# Altium PCB StepStick.PcbDoc
Units mil, origin at the board's own origin, x right, y up, seen from the top; angles counter-clockwise.
Board outline 1100 x 1250 mil, 2 copper layers (Top Layer, Bottom Layer); 4 components, 11 nets, 27 pads, 0 vias.
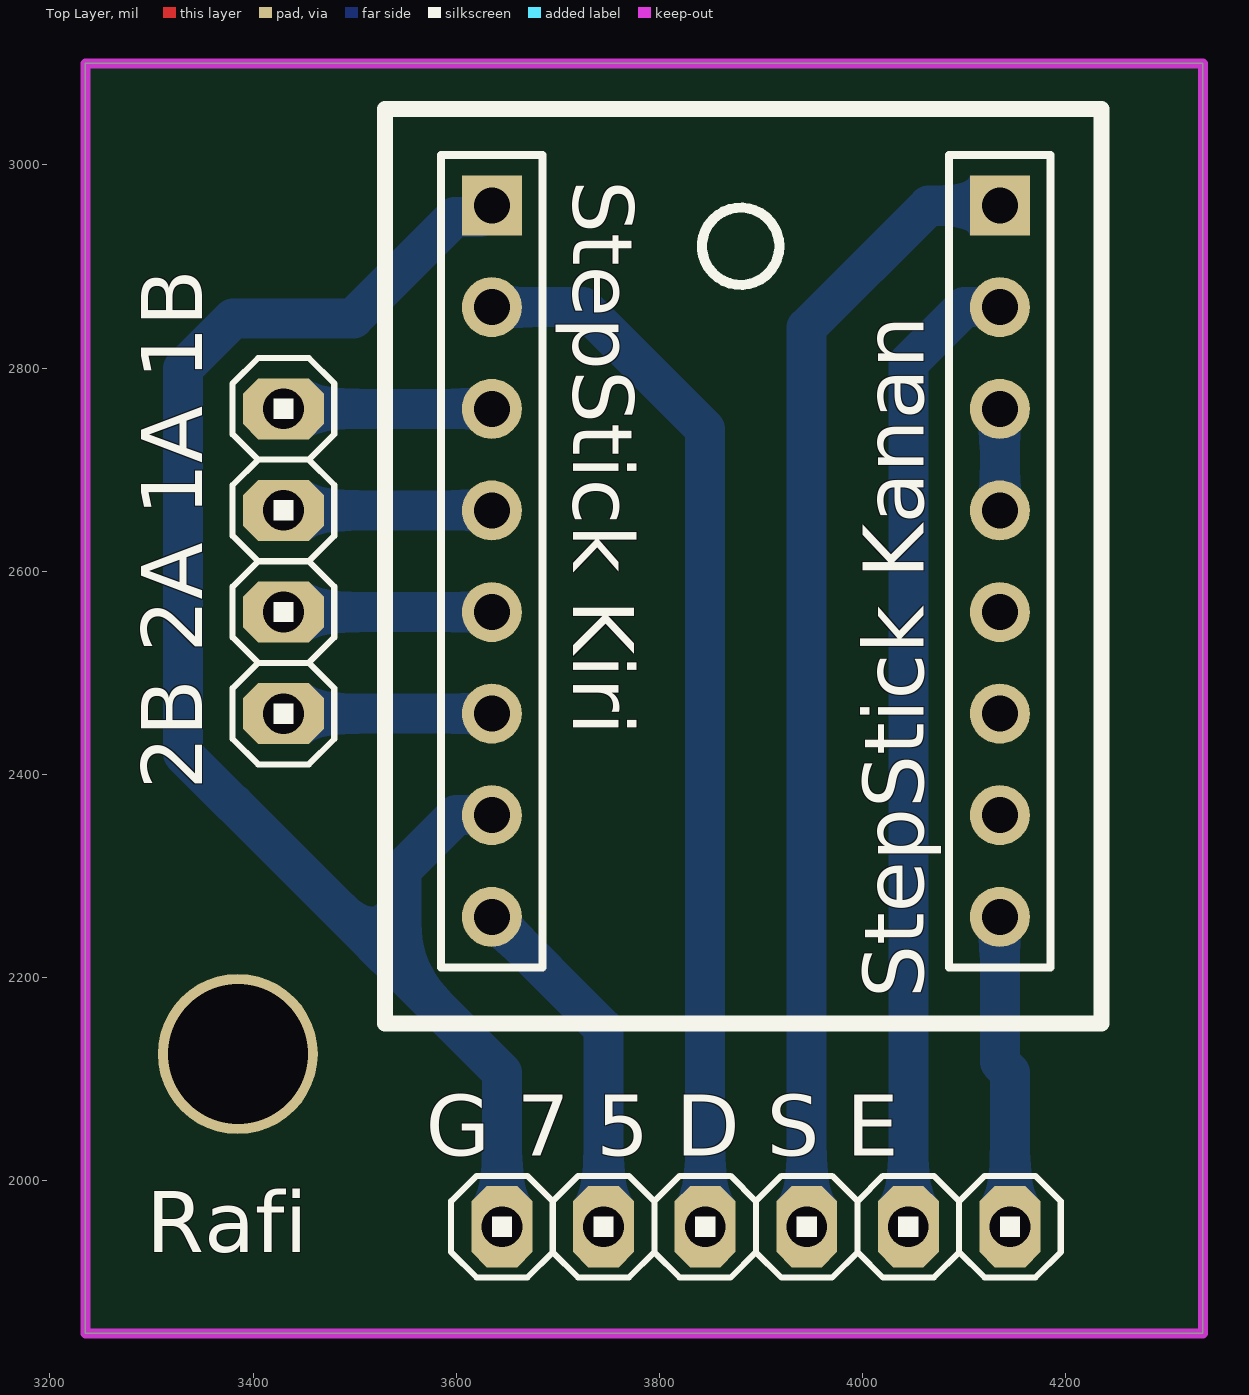
[diagram p0: Top Layer view]
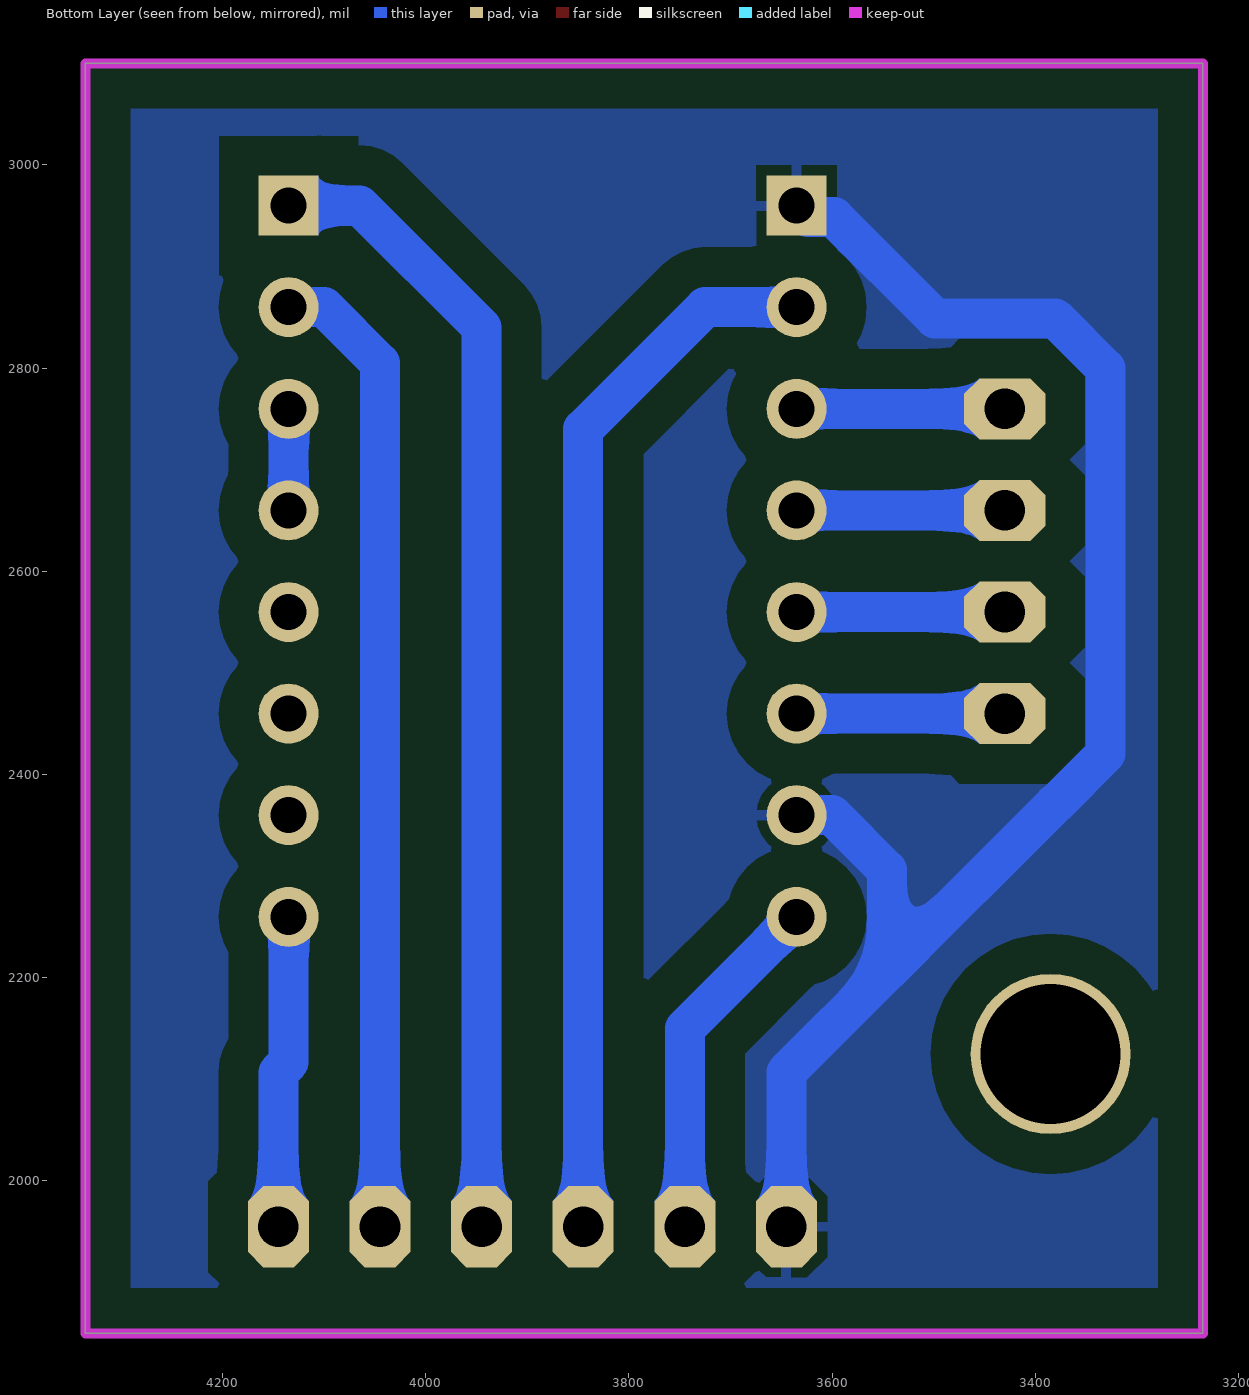
[diagram p1: Bottom Layer view, seen from below]

## Layer stack, top to bottom
Top Solder: solder mask 0.4, Solder Resist, Dk 3.5
Top Layer: signal copper 1.4
Dielectric 1: dielectric 12.6, FR-4, Dk 4.8
Bottom Layer: signal copper 1.4
Bottom Solder: solder mask 0.4, Solder Resist, Dk 3.5

## Board outline
3235,1850 3235,3100 4335,3100 4335,1850

## Design rules (kind name [scope] priority, off if disabled: settings)
Clearance [All] p1: gap=39.37
PolygonConnect [All] p1: connectstyle=Relief reliefconductorwidth=10 reliefentries=4 polygonreliefangle="90 Angle" airgapwidth=10
RoutingVias [All] p1: holewidth=28 width=50 viastyle="Through Hole" minholewidth=28 minwidth=50 maxholewidth=28 maxwidth=50
SolderMaskExpansion [All] p1: expansion=4
Width [All] p1: maxlimit=39.37 minlimit=39.37 preferedwidth=39.37
30 further rules are at their usual default settings.

## Components (designator, comment, footprint, x,y, rotation, side; value= is the part's Value field where it differs from the comment)
"2B 2A 1A 1B" "" My_1X04 3430,2610 r270 top (schematic designator Stepper)
"G 7 5 D S E" "Header 6" My_1X06 3895,1955 r0 top (schematic designator Out)
"StepStick Kanan" "" HDR1X8 4135,2960 r270 top
"StepStick Kiri" "" HDR1X8 3635,2960 r270 top

## Footprints (in the part's own frame and the unit in brackets; to place one, negate y for a bottom-side part, rotate by r counter-clockwise, add the part's x,y. Pads: shape width x height; smd on the part's side, far side on the other; paste and mask are expansions set on the pad)
HDR1X8 [mm] "Connector; Header; 8 Position"
  rect 1.5x1.5 hole 0.9: 1(0,0)
  round 1.5 hole 0.9: 2(2.54,0) 3(5.08,0) 4(7.62,0) 5(10.16,0) 6(12.7,0) 7(15.24,0) 8(17.78,0)
  silkscreen extent -1.27,-1.27 19.05,1.27
My_1X04 [mil]
  oct 60x80 hole 40: 1(-150,0) 2(-50,0) 3(50,0) 4(150,0)
  silkscreen extent -200,-50 200,50
My_1X06 [mil]
  oct 60x80 hole 40: 1(-250,0) 2(-150,0) 3(-50,0) 4(50,0) 5(150,0) 6(250,0)
  silkscreen extent -300,-50 300,50

## Part data
"2B 2A 1A 1B": library part "Header 4", "Header, 4-Pin"
"G 7 5 D S E": "Header, 6-Pin"
"StepStick Kanan" "StepStick Kiri": library part "Header 8", "Header, 8-Pin"

## Free pads (board coordinates)
  round 157.48 hole 137.8: 2(3385,2125)

## Nets (pads, with @x,y where several pads share a name; then routed paths per layer and width w, separated by ;. In a path a pad name is that pad's centre, name@x,y a point inside that pad or via, vN(x,y) a via of type N, cw(c..) or ccw(c..) an arc to the next point about the centre after c; other vN are vias at no path point)
+5: "G 7 5 D S E.3" "StepStick Kiri.2" | length 1044.7
  Bottom Layer w39.37: 3635,2860 3725,2860 3845,2740 3845,1955
+7.4: "G 7 5 D S E.2" "StepStick Kiri.8" | length 350.6
  Bottom Layer w39.37: 3635,2260 3745,2150 3745,1955
GND: "G 7 5 D S E.1" "StepStick Kiri.1" "StepStick Kiri.7" | length 1556.8
  Bottom Layer w39.37: 3635,2360 3600,2360 3546,2306 3546,2206 ; 3635,2960 3623.58,2948.58 3598.31,2948.58 3498.78,2849.06 3380.54,2849.06 3330.94,2799.46 3330.94,2420.54 3380.54,2370.94 3381.06,2370.94 3546,2206 ; 3645,1955 3645,2107 3546,2206
NetOut_4: "G 7 5 D S E.4" "StepStick Kanan.1" | length 1124.7
  Bottom Layer w39.37: 3945,1955 3945,2840 4065,2960 4135,2960
NetOut_5: "G 7 5 D S E.5" "StepStick Kanan.2" | length 962.8
  Bottom Layer w39.37: 4045,1955 4045,2805 4100,2860 4135,2860
NetOut_6: "G 7 5 D S E.6" "StepStick Kanan.8" | length 309.1
  Bottom Layer w39.37: 4135,2260 4135,2117 4145,2107 4145,1955
NetStepper_1: "2B 2A 1A 1B.1" "StepStick Kiri.3" | length 205
  Bottom Layer w39.37: 3430,2760 3635,2760
NetStepper_2: "2B 2A 1A 1B.2" "StepStick Kiri.4" | length 205
  Bottom Layer w39.37: 3430,2660 3635,2660
NetStepper_3: "2B 2A 1A 1B.3" "StepStick Kiri.5" | length 205
  Bottom Layer w39.37: 3430,2560 3635,2560
NetStepper_4: "2B 2A 1A 1B.4" "StepStick Kiri.6" | length 205
  Bottom Layer w39.37: 3430,2460 3635,2460
"NetStepStick Kanan_3": "StepStick Kanan.3" "StepStick Kanan.4" | length 100
  Bottom Layer w39.37: 4135,2660 4135,2760
pads on no net: "StepStick Kanan.5" "StepStick Kanan.6" "StepStick Kanan.7"

## Polygon pours and split planes (outlines as drawn)
GND on Bottom Layer "Bottom Layer-GND" (solid, pour order 2): 3235,3100 3240,3095 4335,3095 4335,1850 3235,1850 3235,3100

## Keep-outs
Keep-Out Layer:
  the board outline again, w10

## Silkscreen, mask and mechanical layers (free items; w line width, h text height)
Top Overlay:
  circle w10: c3880,2920 r38.08
  lines w15.75: 3530,2155 3530,3055 4235,3055 4235,2155 3530,2155
  text "Rafi" at 3295,1930 h60